# Altium PCB PCB_dHandlebar_Lateral_Left.PcbDoc
Units mm, origin at the board's own origin, x right, y up, seen from the top; angles counter-clockwise.
Board outline 50.74 x 34.86 mm, 2 copper layers (Top Layer, Bottom Layer), stack 1.57 mm thick; 17 components, 10 nets, 28 pads, 0 vias.
Unrouted connection lines stored in the file: 13.
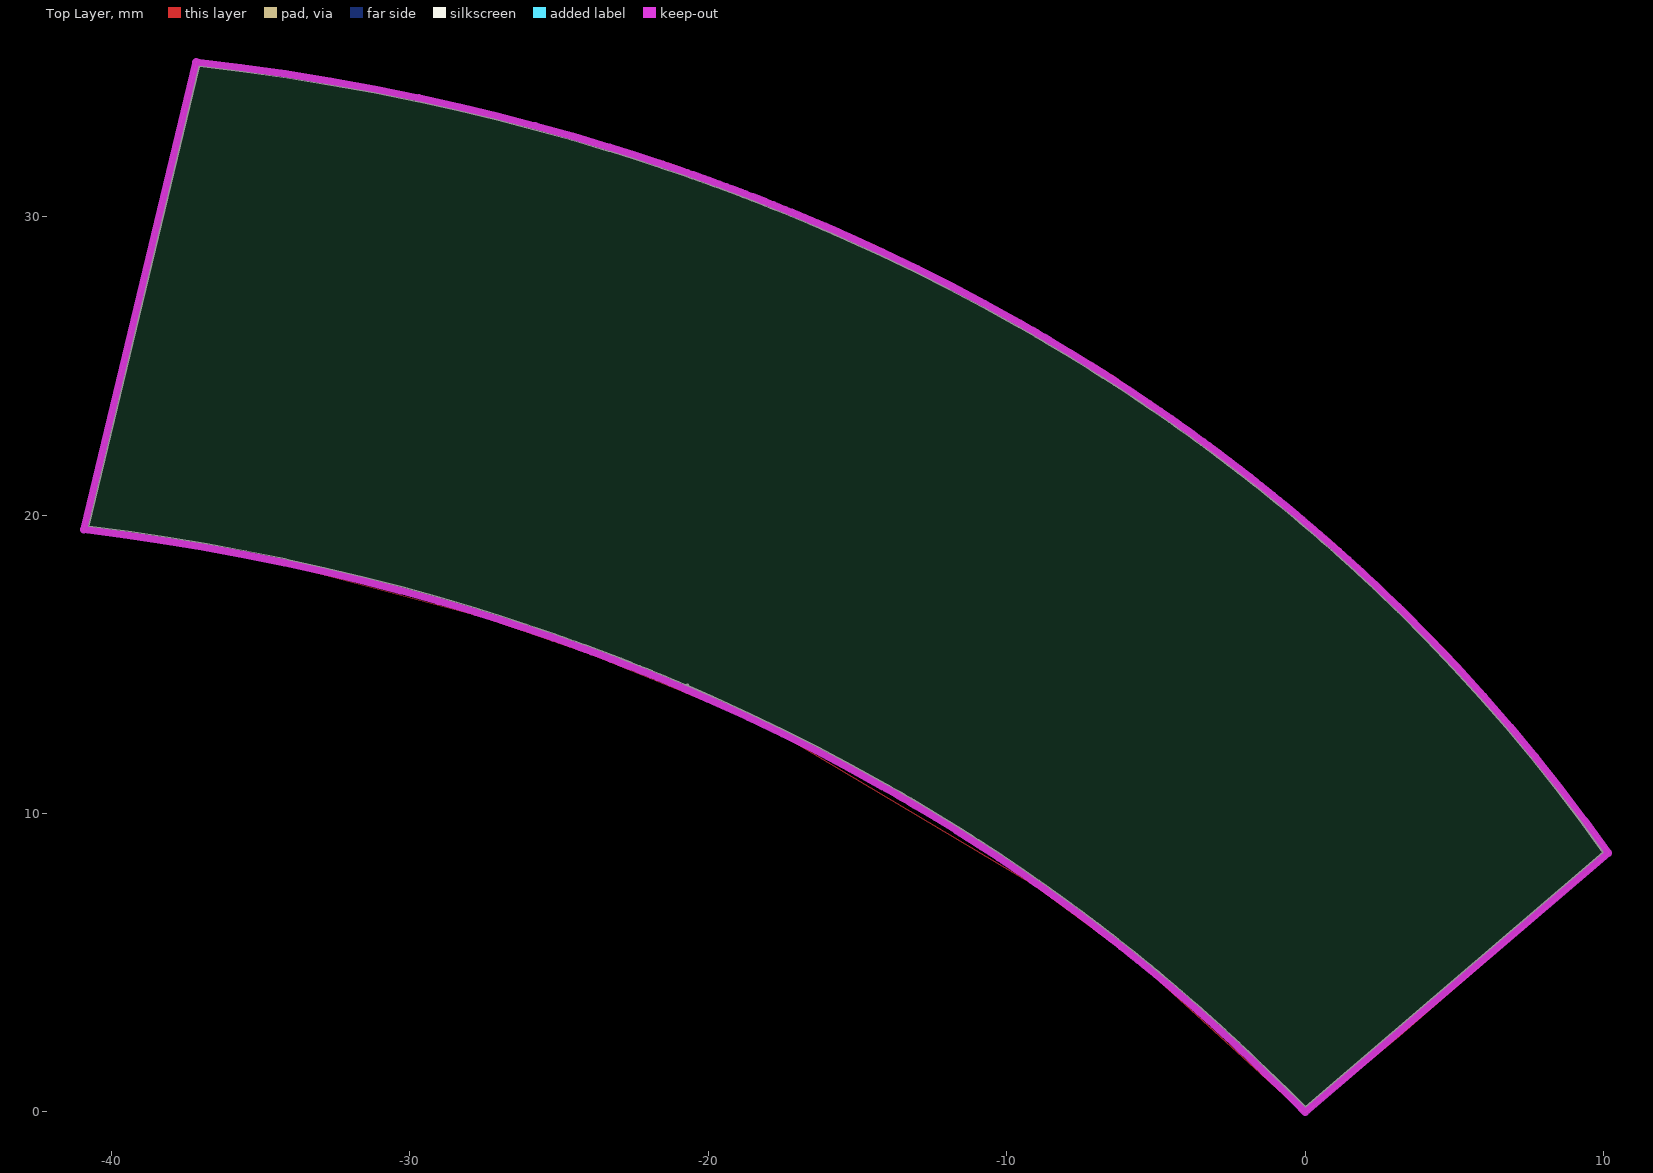
[diagram p0: Top Layer view]
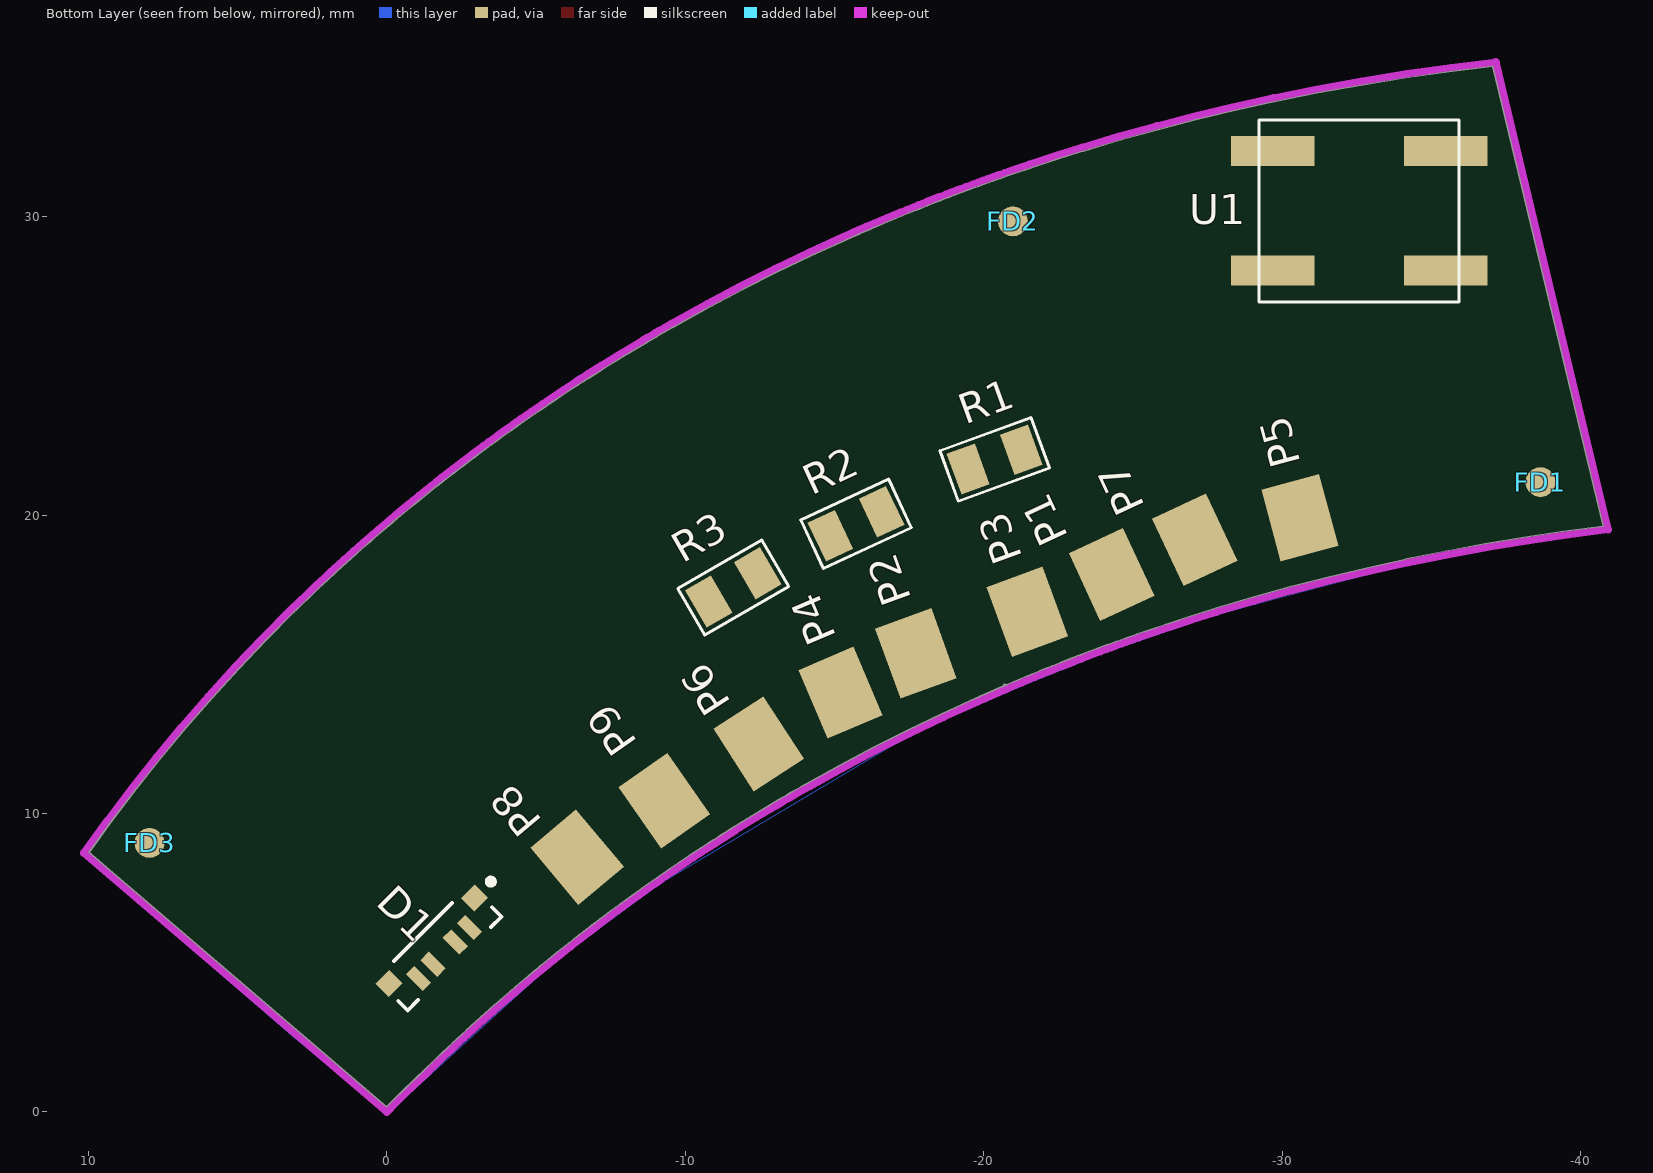
[diagram p1: Bottom Layer view, seen from below]

## Layer stack, top to bottom
Top Solder: solder mask 0.01, Solder Resist, Dk 3.5
Top Layer: signal copper 0.035
Dielectric 1: dielectric 1.5, FR-4, Dk 4.2
Bottom Layer: signal copper 0.035
Bottom Solder: solder mask 0.01, Solder Resist, Dk 3.5

## Board outline
1865 vertices, not listed, extent -40.768,0.174 9.976,35.035

## Design rules (kind name [scope] priority, off if disabled: settings)
Clearance [All] p1: gap=0.254 ignorepadtopadclearanceinfootprint=FALSE except(0: Arc-Hole Track-Hole SMDPad-Hole THPad-Hole Via-Hole Fill-Hole Poly-Hole Region-Hole Text-Hole)
PolygonConnect PolygonConnect_FULL [InPolygonClass('FullPolygon')] p1: connectstyle=Direct reliefconductorwidth=0.254 reliefentries=4 polygonreliefangle="90 Angle" airgapwidth=0.254
PolygonConnect [All] p2: thpad.connectstyle=Relief thpad.reliefconductorwidth=0.254 thpad.reliefentries=4 thpad.polygonreliefangle="90 Angle" thpad.airgapwidth=0.254 smdpad.connectstyle=Relief smdpad.reliefconductorwidth=0.254 smdpad.reliefentries=4 smdpad.polygonreliefangle="90 Angle" smdpad.airgapwidth=0.254 via.connectstyle=Direct via.reliefconductorwidth=0.254 via.reliefentries=4 via.polygonreliefangle="90 Angle" via.airgapwidth=0.254
RoutingVias [All] p1: holewidth=0.864 width=1.473 viastyle="Through Hole" minholewidth=0.864 minwidth=1.473 maxholewidth=0.864 maxwidth=1.473
SolderMaskExpansion [All] p1: expansion=0.102 istentingtop=FALSE
Width [All] p1: maxlimit=1 minlimit=0.254 preferedwidth=0.5
30 further rules are at their usual default settings.

## Classes and differential pairs
polygon class FullPolygon: GND_Bottom GND_Top

## Components (designator, comment, footprint, x,y, rotation, side; value= is the part's Value field where it differs from the comment)
D1 "LED RGB" "LED RGB SMD - QLS6B-FKW-CNSNSF043" -1.712,5.532 r315 bottom
FD1 "FIDUCIAL ROUND" "Fiducial 1mm" -38.659,21.107 r180 bottom value=Fiducial
FD2 "FIDUCIAL ROUND" "Fiducial 1mm" -20.98,29.845 r90 bottom value=Fiducial
FD3 "FIDUCIAL ROUND" "Fiducial 1mm" 7.95,9.017 r90 bottom value=Fiducial
P1 "JUMPER x2" "Connector - 1 Pad 1x2mm"#1 -24.359,17.856 r65 bottom value="HDR-2.54 Male 1x2"
P2 "JUMPER x2" "Connector - 1 Pad 1x2mm"#1 -17.787,15.209 r70 bottom value="HDR-2.54 Male 1x2"
P3 "JUMPER x2" "Connector - 1 Pad 1x2mm"#2 -20.509,17.752 r70 bottom value="HDR-2.54 Male 1x2"
P4 "JUMPER x2" "Connector - 1 Pad 1x2mm"#3 -15.316,14.097 r67 bottom value="HDR-2.54 Male 1x2"
P5 "JUMPER x2" "Connector - 1 Pad 1x2mm"#4 -30.578,19.994 r75 bottom value="HDR-2.54 Male 1x2"
P6 "JUMPER x2" "Connector - 1 Pad 1x2mm"#1 -12.551,12.196 r57 bottom value="HDR-2.54 Male 1x2"
P7 "JUMPER x2" "Connector - 1 Pad 1x2mm"#1 -27.147,19.025 r65 bottom value="HDR-2.54 Male 1x2"
P8 "JUMPER x2" "Connector - 1 Pad 1x2mm"#5 -6.375,8.534 r50 bottom value="HDR-2.54 Male 1x2"
P9 "JUMPER x2" "Connector - 1 Pad 1x2mm"#6 -9.263,10.408 r55 bottom value="HDR-2.54 Male 1x2"
R1 "Res 0805" "RES 0805" -20.371,21.869 r160 bottom value="180 Ohm"
R2 "Res 0805" "RES 0805" -15.723,19.71 r155 bottom value="180 Ohm"
R3 "Res 0805" "RES 0805" -11.608,17.577 r150 bottom value="180 Ohm"
U1 "Hall" "BUTTON - KSC541J" -32.583,30.198 r180 bottom

## Footprints (in the part's own frame and the unit in brackets; to place one, negate y for a bottom-side part, rotate by r counter-clockwise, add the part's x,y. Pads: shape width x height; smd on the part's side, far side on the other; paste and mask are expansions set on the pad)
"BUTTON - KSC541J" [mm]
  rect 2.8x1 smd: 1(-2.9,2) 1(2.9,2) 2(-2.9,-2) 2(2.9,-2)
  silkscreen extent -3.35,-3.05 3.35,3.05, body extent -3.4,-3.15 3.4,3.15, height 5.62
"Connector - 1 Pad 1x2mm"#1 [mm]
  rect 2.5x2 smd: 1(0.168,0)
"Connector - 1 Pad 1x2mm"#2 [mm]
  rect 2.5x2 smd: 1(-1.254,-0.559)
"Connector - 1 Pad 1x2mm"#3 [mm]
  rect 2.5x2 smd: 1(0.006,0.127)
"Connector - 1 Pad 1x2mm"#4 [mm]
  rect 2.5x2 smd: 1(-0.086,0)
"Connector - 1 Pad 1x2mm"#5 [mm]
  rect 2.5x2 smd: 1(0,0)
"Connector - 1 Pad 1x2mm"#6 [mm]
  rect 2.5x2 smd: 1(0,-0.041)
"Fiducial 1mm" [mm]
  round 1 smd paste-1 mask+0.5: 1(0,0)
  Top Layer pour cut-out: -0.066,-1 -0.196,-0.983 -0.322,-0.949 -0.443,-0.899 -0.557,-0.833 -0.661,-0.753 -0.753,-0.661 -0.833,-0.557 -0.899,-0.443 -0.949,-0.322 -0.983,-0.196 -1,-0.066 -1,0.066 -0.983,0.196 -0.949,0.322 -0.899,0.443 -0.833,0.557 -0.753,0.661 -0.661,0.753 -0.557,0.833 -0.443,0.899 -0.322,0.949 -0.196,0.983 -0.066,1 0.066,1 0.196,0.983 0.322,0.949 0.443,0.899 0.557,0.833 0.661,0.753 0.753,0.661 0.833,0.557 0.899,0.443 0.949,0.322 0.983,0.196 1,0.066 1,-0.066 0.983,-0.196 0.949,-0.322 0.899,-0.443 0.833,-0.557 0.753,-0.661 0.661,-0.753 0.557,-0.833 0.443,-0.899 0.322,-0.949 0.196,-0.983 0.066,-1
  body extent -0.5,-0.5 0.5,0.5, height 0.04
"LED RGB SMD - QLS6B-FKW-CNSNSF043" [mm] "LED RGB de  CREE LED"
  rect 0.66x0.63 smd: 1(-2.02,-0.292) 6(2.02,-0.293)
  rect 0.4x0.8 smd: 2(-1.21,0.292) 3(-0.53,0.293) 4(0.53,0.293) 5(1.21,0.292)
  silkscreen extent -2.9,-0.71 2.23,0.79, body extent -2.32,-0.65 2.32,0.85, height 1.65
"RES 0805" [mm]
  rect 1x1.45 smd: 1(-0.95,0) 2(0.95,0)
  silkscreen extent -1.63,-0.9 1.62,0.9, body extent -1,-0.63 1,0.62, height 0.68

## Part data
D1: library part "LED RGB QLS6B-FKW-CNSNSF043", "LED, Superior, Transparente, RGB, Rojo, Verde, Azul, SMD, 120°, Redondo, R 30mA, V 30mA, B 30mA", Supplier Part Number 1=941-QLS6BFKWNSNSF043, LatestRevisionDate=17-Jul-2002, LatestRevisionNote="Re-released for DXP Platform.", Publisher="Altium Limited", Supplier 1=Mouser, Supplier 2=Digi-Key, Supplier 3=Farnell, Supplier Part Number 2=QLS6B-FKW-CNSNSF043CT-ND, Supplier Part Number 3=3217314
FD1 FD2 FD3: library part FIDUCIAL, "Fiducial", Category=Hardware, ComponentLink1Description="SVN Datasheet", ComponentLink2Description="Local Datasheet", ComponentLink3Description="Open Symbol", ComponentLink3URL="C:\ALTIUM_WORK\00001_MCHP-CDB\Library\LibraryRefs\FIDUCIAL ROUND.SchLib", ComponentLink4Description="Open Footprint", ComponentLink4URL=C:\ALTIUM_WORK\00001_MCHP-CDB\Library\Footprints\Fiducial_1mm.PcbLib, ComponentLink5Description="Open Footprint 2", ComponentLink6Description="Open Footprint 3", ComponentLink7Description="Open Footprint 4", Description_="FIDUCIAL ROUND PCB 1mm SMD", Dev Tools Status=Design, MCHP-ID=MECH0282, Owner="Dragos Danaila", Populated=MECH, Quantity Override=1, Revision=A, Status="MCL Design", Symbol="FIDUCIAL ROUND", Type=Fiducial
P1 P2 P3 P4 P5 P6 P7 P8 P9: library part "CONNECTOR PAD", "Conector Pad", Category=Connector, ComponentLink1Description="SVN Datasheet", ComponentLink1URL=https://chn-vm-apps.microchip.com/mchprepo/parts/Datasheets/77311.pdf, ComponentLink2Description="Local Datasheet", ComponentLink2URL=C:\ALTIUM_WORK\00001_MCHP-CDB\Datasheets\77311.pdf, ComponentLink3Description="Open Symbol", ComponentLink3URL="C:\ALTIUM_WORK\00001_MCHP-CDB\Library\LibraryRefs\Header 1x2.SchLib", ComponentLink4Description="Open Footprint", ComponentLink4URL=C:\ALTIUM_WORK\00001_MCHP-CDB\Library\Footprints\HDR_M_2.54_1x2.PcbLib, ComponentLink5Description="Open Footprint 2", ComponentLink6Description="Open Footprint 3", ComponentLink7Description="Open Footprint 4", Description_="CON HDR-2.54 Male 1x2 Gold 5.84MH TH VERT", Dev Tools Status=Production, MCHP-ID=CON1108, Owner="Bogdan P (M91398)", Populated=Yes, Quantity Override=1, Revision=1, Status="MCL Design", Symbol="Header 1x2", Type="Header 2.54mm"
R1 R2 R3: library part "R 0805", "Resistencia SMD de Tipo Chip, Película Gruesa, 180 ohm, ± 1%, 500 mW, 0805 [Métrica 2012]", Supplier Part Number 1=667-ERJ-P06F1800V, LatestRevisionDate=17-Jul-2002, LatestRevisionNote="Re-released for DXP Platform.", PackageDescription="Axial Device, Thru-Hole; 2 Leads; 0.3 in Pin Spacing", PackageReference=AXIAL-0.3, Published=8-Jun-2000, Publisher="Altium Limited", Supplier 1=Mouser, Supplier 2=Digi-Key, Supplier 3=Farnell, Supplier Part Number 2=P16063CT-ND, Supplier Part Number 3=1750745
U1: library part KSC541J, "Interruptor Táctil, Sealed, KSC Series, Accionamiento Superior, Montaje Superficial, Botón Redondo", Supplier Part Number 1=611-KSC541JROHS, ComponentLink5Description="Open Footprint 2", ComponentLink6Description="Open Footprint 3", ComponentLink7Description="Open Footprint 4", Revision=1, Supplier 1=Mouser, Supplier 2=Digi-Key, Supplier 3=Farnell, Supplier Part Number 2=401-1910-1-ND, Supplier Part Number 3=3780578

## Nets (pads, with @x,y where several pads share a name; then routed paths per layer and width w, separated by ;. In a path a pad name is that pad's centre, name@x,y a point inside that pad or via, vN(x,y) a via of type N, cw(c..) or ccw(c..) an arc to the next point about the centre after c; other vN are vias at no path point)
+5: D1.1 D1.3 D1.5 P1.1 P8.1 U1.1
GND: P7.1
LED_B: P4.1 R3.1
LED_G: P3.1 R1.2
LED_R: P2.1 R2.1
NetD1_2: D1.2 R1.1
NetD1_4: D1.4 R2.2
NetD1_6: D1.6 R3.2
Output_BAction: P6.1 P9.1
Output_BConfig: P5.1 U1.2
pads on no net: FD1.1 FD2.1 FD3.1

## Polygon pours and split planes (outlines as drawn)
no net on Top Layer "GND_Top" (solid, shelved, pour order 1): -37.16,35.204 -38.241,30.882 -40.945,19.507 -35.458,18.694 -27.508,16.586 -23.927,15.342 -18.11,12.979 -9.093,7.62 -5.573,5.026 -0.152,0.051 0,-0.025 3.154,2.531 10.008,8.509 10.185,8.687 7.075,12.629 4.685,15.468 1.079,18.943 -6.473,24.679 -14.455,29.054 -21.318,31.794 -29.845,34.061
no net on Bottom Layer "GND_Bottom" (solid, shelved, pour order 0): -37.16,35.204 -38.241,30.882 -40.945,19.507 -35.458,18.694 -27.508,16.586 -23.927,15.342 -18.11,12.979 -9.093,7.62 -5.573,5.026 -0.152,0.051 0,-0.025 3.154,2.531 10.008,8.509 10.185,8.687 7.075,12.629 4.685,15.468 1.079,18.943 -6.473,24.679 -14.455,29.054 -21.318,31.794 -29.845,34.061

## Keep-outs
Keep-Out Layer:
  lines w0.254: -40.927,19.52 cw(c-50.004,-56.261) -34.205,18.409 -34.1,18.386 cw(c-49.516,-53.979) -27.8,16.751 -27.71,16.724 cw(c-48.982,-52.175) -26.218,16.245 -26.151,16.223 -26.024,16.18 -25.819,16.111 -25.614,16.041 -25.409,15.971 -25.205,15.9 -25,15.828 -24.927,15.802 -24.796,15.756 -24.756,15.741 -24.629,15.696 -24.461,15.635 -24.294,15.575 -24.127,15.513 -23.905,15.431 -23.683,15.348 -23.461,15.265 -23.373,15.231 ; -40.921,19.534 -37.158,35.184 ; -37.172,35.175 cw(c-45.508,-40.691) -29.708,33.979 ; -29.709,33.979 -29.605,33.957 cw(c-45.021,-38.409) -23.304,32.322 -23.214,32.294 cw(c-44.486,-36.604) -21.722,31.815 -21.655,31.793 -21.528,31.751 -21.323,31.681 -21.118,31.612 -20.914,31.541 -20.709,31.47 -20.505,31.398 -20.432,31.372 -20.3,31.326 -20.26,31.311 -20.133,31.266 -19.966,31.205 -19.799,31.145 -19.632,31.084 -19.409,31.001 -19.187,30.918 -18.965,30.835 -18.877,30.801 ; -22.906,15.051 -22.919,15.056 -22.932,15.062 -22.946,15.067 -22.961,15.073 -22.977,15.079 -22.993,15.085 -23.01,15.092 -23.02,15.096 ; -22.893,15.046 -22.881,15.042 ; -22.87,15.037 -22.859,15.033 -22.849,15.029 -22.84,15.026 -22.832,15.023 -22.825,15.02 -22.818,15.017 -22.812,15.015 -22.806,15.013 -22.802,15.011 -22.798,15.009 -22.795,15.008 -22.793,15.007 -22.792,15.007 -22.792,15.007 ; -22.8,15.01 -23.02,15.096 ; -22.689,14.967 -22.701,14.971 -22.713,14.976 -22.724,14.98 -22.734,14.984 -22.743,14.988 -22.751,14.991 -22.759,14.994 -22.766,14.997 -22.772,14.999 -22.777,15.001 -22.782,15.003 -22.785,15.004 -22.788,15.005 -22.79,15.006 -22.791,15.007 ; -22.676,14.962 -22.663,14.956 -22.649,14.951 -22.635,14.945 -22.62,14.939 -22.604,14.933 -22.587,14.927 -22.581,14.924 ; -22.36,14.837 -22.345,14.83 -22.325,14.823 -22.235,14.786 ; -20.833,14.206 -21.05,14.299 -21.268,14.39 -21.486,14.481 -21.704,14.571 -21.923,14.66 -22.142,14.749 -22.235,14.786 -22.36,14.837 -22.361,14.837 -22.58,14.924 ; -20.606,14.109 -20.615,14.113 ; -20.587,14.101 -20.569,14.093 -20.551,14.086 -20.534,14.078 -20.517,14.071 -20.501,14.064 ; -20.485,14.057 -20.469,14.05 ; -20.454,14.043 -20.439,14.037 -20.425,14.031 -20.412,14.025 ; -20.194,13.93 -20.206,13.935 -20.217,13.94 -20.227,13.945 -20.237,13.949 -20.246,13.953 -20.253,13.956 -20.26,13.959 -20.266,13.962 -20.272,13.964 -20.277,13.966 -20.281,13.968 -20.284,13.969 -20.286,13.97 -20.287,13.971 ; -20.182,13.925 -20.17,13.919 ; -20.156,13.913 -20.142,13.907 -20.127,13.901 -20.111,13.894 -20.095,13.887 -20.079,13.879 -20.062,13.872 -20.045,13.865 -20.028,13.857 -20.01,13.849 -19.991,13.841 -19.972,13.832 -19.967,13.83 ; -17.865,30.407 -17.849,30.401 -17.83,30.393 -17.739,30.357 ; -16.337,29.777 -16.554,29.869 -16.772,29.96 -16.99,30.051 -17.208,30.141 -17.427,30.231 -17.646,30.319 -17.739,30.357 -17.865,30.407 -17.865,30.407 -18.084,30.494 ; -16.11,29.679 -16.12,29.683 ; -16.092,29.671 -16.073,29.663 -16.056,29.656 -16.038,29.648 -16.022,29.641 -16.005,29.634 ; -15.989,29.627 -15.973,29.62 ; -15.958,29.614 -15.943,29.607 -15.929,29.601 -15.916,29.595 ; -15.699,29.5 -15.71,29.505 -15.721,29.51 -15.731,29.515 -15.741,29.519 -15.75,29.523 -15.757,29.526 -15.764,29.529 -15.771,29.532 -15.776,29.534 -15.781,29.536 -15.785,29.538 -15.788,29.539 -15.79,29.54 -15.791,29.541 ; -15.687,29.495 -15.674,29.49 ; -15.661,29.484 -15.646,29.477 -15.631,29.471 -15.615,29.464 -15.599,29.457 -15.583,29.45 -15.566,29.442 -15.549,29.435 -15.532,29.427 -15.514,29.419 -15.495,29.411 -15.476,29.402 -15.471,29.4 ; -1.301,1.271 -1.37,1.34 ; -0.003,-0.002 10.146,8.682 ; 0.006,-0.006 ccw(c-34.348,-33.765) -0.623,0.622 -1.37,1.34 ; 10.152,8.675 ccw(c-38.819,-25.998) 3.195,16.841 ; -23.373,15.231 -23.301,15.204 ; -23.373,15.231 -23.301,15.204 ; -23.301,15.204 -23.241,15.181 ; -23.301,15.204 -23.283,15.197 -23.264,15.19 -23.246,15.182 -23.241,15.181 ; -23.241,15.181 -23.24,15.181 -23.02,15.096 ; -23.02,15.096 -23.02,15.096 ; -22.792,15.007 -22.791,15.007 ; -22.581,14.924 -22.58,14.924 ; -20.616,14.114 -20.794,14.19 -20.757,14.174 -20.738,14.166 -20.719,14.158 -20.7,14.15 -20.681,14.142 -20.663,14.134 -20.644,14.126 -20.625,14.117 -20.616,14.114 ; -20.616,14.114 -20.615,14.113 ; -20.615,14.113 -20.399,14.02 ; -20.399,14.02 -20.288,13.971 ; -20.399,14.02 -20.387,14.014 -20.375,14.009 -20.364,14.004 -20.354,14 -20.344,13.996 -20.336,13.992 -20.327,13.988 -20.32,13.985 -20.314,13.982 -20.308,13.98 -20.302,13.977 -20.298,13.975 -20.294,13.974 -20.292,13.973 -20.29,13.972 -20.288,13.971 ; -20.288,13.971 -20.288,13.971 ; -20.288,13.971 -20.288,13.971 ; -20.288,13.971 -20.183,13.925 -19.967,13.83 ; -20.288,13.971 -20.287,13.971 ; -19.967,13.83 -19.967,13.83 ; -19.967,13.83 -19.966,13.83 ; -19.966,13.83 -19.876,13.79 ; -19.966,13.83 -19.953,13.824 -19.934,13.815 -19.915,13.807 -19.896,13.798 -19.876,13.79 ; -19.876,13.79 -19.814,13.762 ; -19.876,13.79 -19.814,13.762 ; -19.814,13.762 cw(c-46.855,-46.936) -14.124,10.893 ; -18.877,30.801 -18.806,30.774 ; -18.877,30.801 -18.806,30.774 ; -18.806,30.774 -18.787,30.767 -18.768,30.76 -18.75,30.753 -18.745,30.751 ; -18.806,30.774 -18.745,30.751 ; -18.745,30.751 -18.745,30.751 -18.524,30.666 ; -18.524,30.666 -18.524,30.666 ; -18.524,30.666 -18.514,30.662 -18.497,30.655 -18.481,30.649 -18.466,30.643 -18.45,30.637 -18.436,30.632 -18.423,30.626 -18.41,30.621 -18.397,30.617 -18.385,30.612 -18.374,30.608 -18.363,30.603 -18.353,30.599 -18.344,30.596 -18.336,30.593 -18.329,30.59 -18.322,30.587 -18.316,30.585 -18.31,30.583 -18.306,30.581 -18.302,30.58 -18.299,30.578 -18.297,30.578 -18.296,30.577 -18.296,30.577 ; -18.524,30.666 -18.304,30.58 -18.085,30.494 ; -18.296,30.577 -18.295,30.577 ; -18.295,30.577 -18.294,30.576 -18.292,30.576 -18.289,30.575 -18.286,30.573 -18.281,30.571 -18.276,30.569 -18.27,30.567 -18.263,30.564 -18.255,30.561 -18.247,30.558 -18.238,30.554 -18.228,30.55 -18.217,30.546 -18.206,30.542 -18.193,30.537 -18.18,30.532 -18.167,30.527 -18.153,30.521 -18.139,30.515 -18.124,30.51 -18.108,30.503 -18.091,30.497 -18.085,30.494 ; -18.085,30.494 -18.084,30.494 ; -16.12,29.684 -16.129,29.688 -16.148,29.696 -16.167,29.704 -16.186,29.712 -16.205,29.72 -16.224,29.728 -16.243,29.736 -16.262,29.744 -16.298,29.76 -16.12,29.684 ; -16.12,29.684 -16.12,29.683 ; -16.12,29.683 -15.903,29.59 ; -15.903,29.59 -15.891,29.585 -15.88,29.579 -15.869,29.575 -15.858,29.57 -15.848,29.566 -15.84,29.562 -15.832,29.559 -15.824,29.555 -15.818,29.553 -15.812,29.55 -15.806,29.548 -15.802,29.546 -15.798,29.544 -15.796,29.543 -15.794,29.542 -15.793,29.542 ; -15.903,29.59 -15.792,29.541 ; -15.792,29.541 -15.687,29.495 -15.471,29.4 ; -15.793,29.542 -15.792,29.541 ; -15.792,29.541 -15.792,29.541 ; -15.792,29.541 -15.791,29.541 ; -15.471,29.4 -15.471,29.4 ; -15.471,29.4 -15.471,29.4 ; -15.471,29.4 -15.457,29.394 -15.438,29.386 -15.419,29.377 -15.4,29.369 -15.381,29.36 ; -15.471,29.4 -15.381,29.36 ; -15.381,29.36 -15.318,29.332 ; -15.381,29.36 -15.318,29.332 ; -15.318,29.332 cw(c-42.359,-31.366) -9.628,26.463 ; -14.124,10.893 -14.054,10.853 ; -14.124,10.893 -14.054,10.853 ; -14.054,10.853 -14.035,10.842 -14.028,10.838 ; -14.054,10.853 -14.028,10.838 ; -14.028,10.838 -14.027,10.838 ; -14.027,10.838 -13.835,10.728 -13.643,10.617 ; -13.643,10.617 -13.637,10.614 -13.626,10.607 -13.615,10.601 -13.606,10.596 -13.597,10.591 -13.589,10.586 -13.581,10.582 -13.574,10.578 -13.568,10.574 -13.562,10.571 -13.558,10.568 -13.553,10.565 -13.55,10.563 -13.547,10.562 -13.546,10.561 -13.545,10.56 -13.544,10.56 ; -13.643,10.617 -13.643,10.617 ; -13.643,10.617 -13.452,10.507 ; -13.544,10.56 -13.544,10.56 ; -13.544,10.56 -13.543,10.559 -13.541,10.558 -13.538,10.557 -13.535,10.555 -13.531,10.553 -13.526,10.55 -13.52,10.546 -13.513,10.542 -13.506,10.538 -13.498,10.533 -13.49,10.528 -13.48,10.523 -13.47,10.517 -13.458,10.51 -13.453,10.507 ; -13.452,10.507 -13.262,10.395 ; -13.452,10.507 -13.452,10.507 ; -13.262,10.395 -13.258,10.393 -13.239,10.382 -13.22,10.371 -13.201,10.36 -13.182,10.348 -13.162,10.337 -13.143,10.325 -13.124,10.314 -13.104,10.303 -13.085,10.291 -13.077,10.287 ; -13.262,10.395 -13.077,10.287 ; -13.262,10.395 -13.262,10.395 ; -13.077,10.287 cw(c-45.631,-44.75) -11.706,9.452 ; -11.706,9.452 -11.567,9.365 ; -11.706,9.452 -11.67,9.43 -11.651,9.418 -11.632,9.406 -11.613,9.394 -11.594,9.382 -11.575,9.37 -11.567,9.365 ; -11.567,9.365 -11.566,9.364 -11.38,9.247 -11.38,9.247 ; -11.38,9.247 -11.367,9.239 -11.355,9.231 -11.343,9.223 -11.331,9.216 -11.321,9.209 -11.31,9.202 -11.3,9.196 -11.291,9.19 -11.282,9.185 -11.275,9.18 -11.267,9.175 -11.261,9.171 -11.255,9.167 -11.25,9.164 -11.245,9.161 -11.241,9.158 -11.238,9.156 -11.235,9.154 -11.233,9.153 -11.232,9.153 ; -11.38,9.247 -11.194,9.128 ; -11.232,9.152 -11.231,9.152 -11.229,9.151 -11.227,9.149 -11.223,9.147 -11.219,9.144 -11.215,9.141 -11.209,9.138 -11.203,9.134 -11.196,9.13 -11.194,9.128 ; -11.232,9.152 -11.232,9.152 ; -11.232,9.153 -11.232,9.152 ; -11.194,9.128 -11.194,9.128 ; -11.194,9.128 -11.008,9.009 ; -11.008,9.009 -11.008,9.009 ; -11.008,9.009 -11.001,9.004 -10.983,8.993 -10.965,8.981 -10.947,8.969 -10.928,8.957 -10.909,8.945 -10.89,8.933 -10.872,8.921 -10.853,8.908 -10.834,8.896 ; -11.008,9.009 -10.834,8.896 ; -10.834,8.896 -10.829,8.893 ; -10.834,8.896 -10.829,8.893 ; -10.829,8.893 -10.823,8.889 -10.639,8.769 -10.454,8.648 -10.27,8.526 -10.086,8.403 -9.902,8.28 -9.719,8.156 -9.536,8.031 -9.353,7.905 -9.171,7.779 -8.99,7.653 -8.81,7.526 -8.63,7.398 -8.45,7.27 -8.271,7.142 -8.092,7.012 -7.914,6.882 -7.736,6.751 -7.559,6.62 -7.382,6.488 -7.206,6.355 -7.03,6.222 -6.855,6.088 -6.68,5.954 -6.506,5.819 -6.332,5.683 -6.158,5.547 -5.986,5.409 -5.785,5.249 -5.585,5.088 -5.386,4.927 -5.188,4.764 -4.99,4.6 -4.794,4.437 -4.598,4.272 -4.403,4.107 -4.209,3.941 -4.016,3.774 -3.855,3.634 -3.695,3.494 -3.535,3.353 -3.376,3.212 -3.217,3.07 -3.059,2.927 -2.902,2.784 -2.744,2.641 -2.588,2.496 -2.432,2.351 -2.276,2.206 -2.121,2.06 -1.947,1.895 -1.774,1.73 -1.601,1.564 -1.429,1.397 -1.401,1.37 ; -9.628,26.463 -9.558,26.423 ; -9.628,26.463 -9.558,26.423 ; -9.558,26.423 -9.532,26.408 ; -9.558,26.423 -9.539,26.412 -9.532,26.408 ; -9.531,26.408 -9.339,26.298 -9.147,26.188 ; -9.532,26.408 -9.531,26.408 ; -9.147,26.187 -8.957,26.077 ; -9.147,26.188 -9.147,26.187 ; -9.147,26.187 -9.141,26.184 -9.13,26.178 -9.12,26.172 -9.11,26.166 -9.101,26.161 -9.093,26.156 -9.085,26.152 -9.078,26.148 -9.072,26.144 -9.067,26.141 -9.062,26.138 -9.058,26.136 -9.054,26.134 -9.052,26.132 -9.05,26.131 -9.049,26.131 -9.048,26.13 ; -9.048,26.13 -9.047,26.129 -9.045,26.128 -9.043,26.127 -9.04,26.125 -9.035,26.123 -9.03,26.12 -9.024,26.116 -9.018,26.112 -9.01,26.108 -9.002,26.104 -8.994,26.099 -8.985,26.093 -8.974,26.087 -8.962,26.08 -8.957,26.077 ; -9.048,26.13 -9.048,26.13 ; -8.957,26.077 -8.956,26.077 ; -8.956,26.077 -8.766,25.966 ; -8.766,25.966 -8.766,25.965 ; -8.766,25.965 -8.581,25.857 ; -8.766,25.965 -8.762,25.963 -8.744,25.952 -8.725,25.941 -8.705,25.93 -8.686,25.918 -8.666,25.907 -8.647,25.895 -8.628,25.884 -8.608,25.873 -8.589,25.861 -8.581,25.857 ; -8.581,25.857 cw(c-41.135,-29.18) -7.21,25.022 ; -7.21,25.022 -7.174,25 -7.155,24.988 -7.136,24.976 -7.117,24.964 -7.098,24.952 -7.079,24.94 -7.071,24.935 ; -7.21,25.022 -7.071,24.935 ; -7.071,24.935 -7.071,24.935 -6.884,24.817 -6.884,24.817 ; -6.884,24.817 -6.698,24.698 ; -6.884,24.817 -6.871,24.809 -6.859,24.801 -6.847,24.793 -6.836,24.786 -6.825,24.779 -6.814,24.772 -6.804,24.766 -6.795,24.76 -6.787,24.755 -6.779,24.75 -6.772,24.745 -6.765,24.741 -6.759,24.737 -6.754,24.734 -6.749,24.731 -6.745,24.728 -6.742,24.726 -6.739,24.725 -6.738,24.724 -6.737,24.723 ; -6.737,24.723 -6.736,24.723 ; -6.736,24.723 -6.736,24.722 ; -6.736,24.722 -6.735,24.722 -6.733,24.721 -6.731,24.719 -6.728,24.717 -6.724,24.715 -6.719,24.712 -6.713,24.708 -6.707,24.704 -6.7,24.7 -6.698,24.699 ; -6.698,24.698 -6.513,24.579 ; -6.698,24.698 -6.698,24.698 ; -6.512,24.579 -6.338,24.466 ; -6.512,24.579 -6.505,24.574 -6.487,24.563 -6.469,24.551 -6.451,24.539 -6.432,24.527 -6.413,24.515 -6.395,24.503 -6.376,24.491 -6.357,24.479 -6.338,24.466 ; -6.513,24.579 -6.512,24.579 ; -6.338,24.466 -6.333,24.463 ; -6.338,24.466 -6.333,24.463 ; -6.333,24.463 -6.328,24.46 -6.143,24.339 -5.958,24.218 -5.775,24.096 -5.59,23.974 -5.406,23.85 -5.223,23.726 -5.04,23.601 -4.857,23.475 -4.675,23.349 -4.494,23.223 -4.314,23.096 -4.134,22.969 -3.954,22.841 -3.775,22.712 -3.597,22.582 -3.418,22.452 -3.241,22.322 -3.063,22.19 -2.887,22.058 -2.71,21.926 -2.535,21.792 -2.359,21.659 -2.184,21.524 -2.01,21.389 -1.836,21.253 -1.663,21.117 -1.49,20.98 -1.289,20.82 -1.089,20.659 -0.89,20.497 -0.692,20.334 -0.494,20.171 -0.298,20.007 -0.102,19.843 0.092,19.677 0.287,19.511 0.48,19.344 0.641,19.205 0.801,19.064 0.96,18.923 1.12,18.782 1.278,18.64 1.437,18.498 1.594,18.354 1.751,18.211 1.908,18.066 2.064,17.922 2.22,17.776 2.375,17.63 2.549,17.466 2.722,17.3 2.895,17.134 3.067,16.967 3.094,16.94 ; -1.401,1.37 -1.37,1.34 ; -1.401,1.37 -1.37,1.34 ; 3.094,16.94 3.125,16.91 ; 3.094,16.94 3.125,16.91 ; 3.125,16.91 3.195,16.841 ; 3.125,16.91 3.195,16.841

## Silkscreen, mask and mechanical layers (free items; w line width, h text height)
Mechanical 2:
  drawing of 17490 lines, arcs and shapes, not listed
Mechanical 4:
  drawing of 2062 lines, arcs and shapes, not listed